# Altium PCB ertc_breakout_pcb.PcbDoc
Units mil, origin at the board's own origin, x right, y up, seen from the top; angles counter-clockwise.
Board outline 6300 x 8400 mil, 4 copper layers (Top Layer, Int1, Int2, Bottom Layer), stack 53.912 mil thick; 59 components, 84 nets, 412 pads, 22 vias.
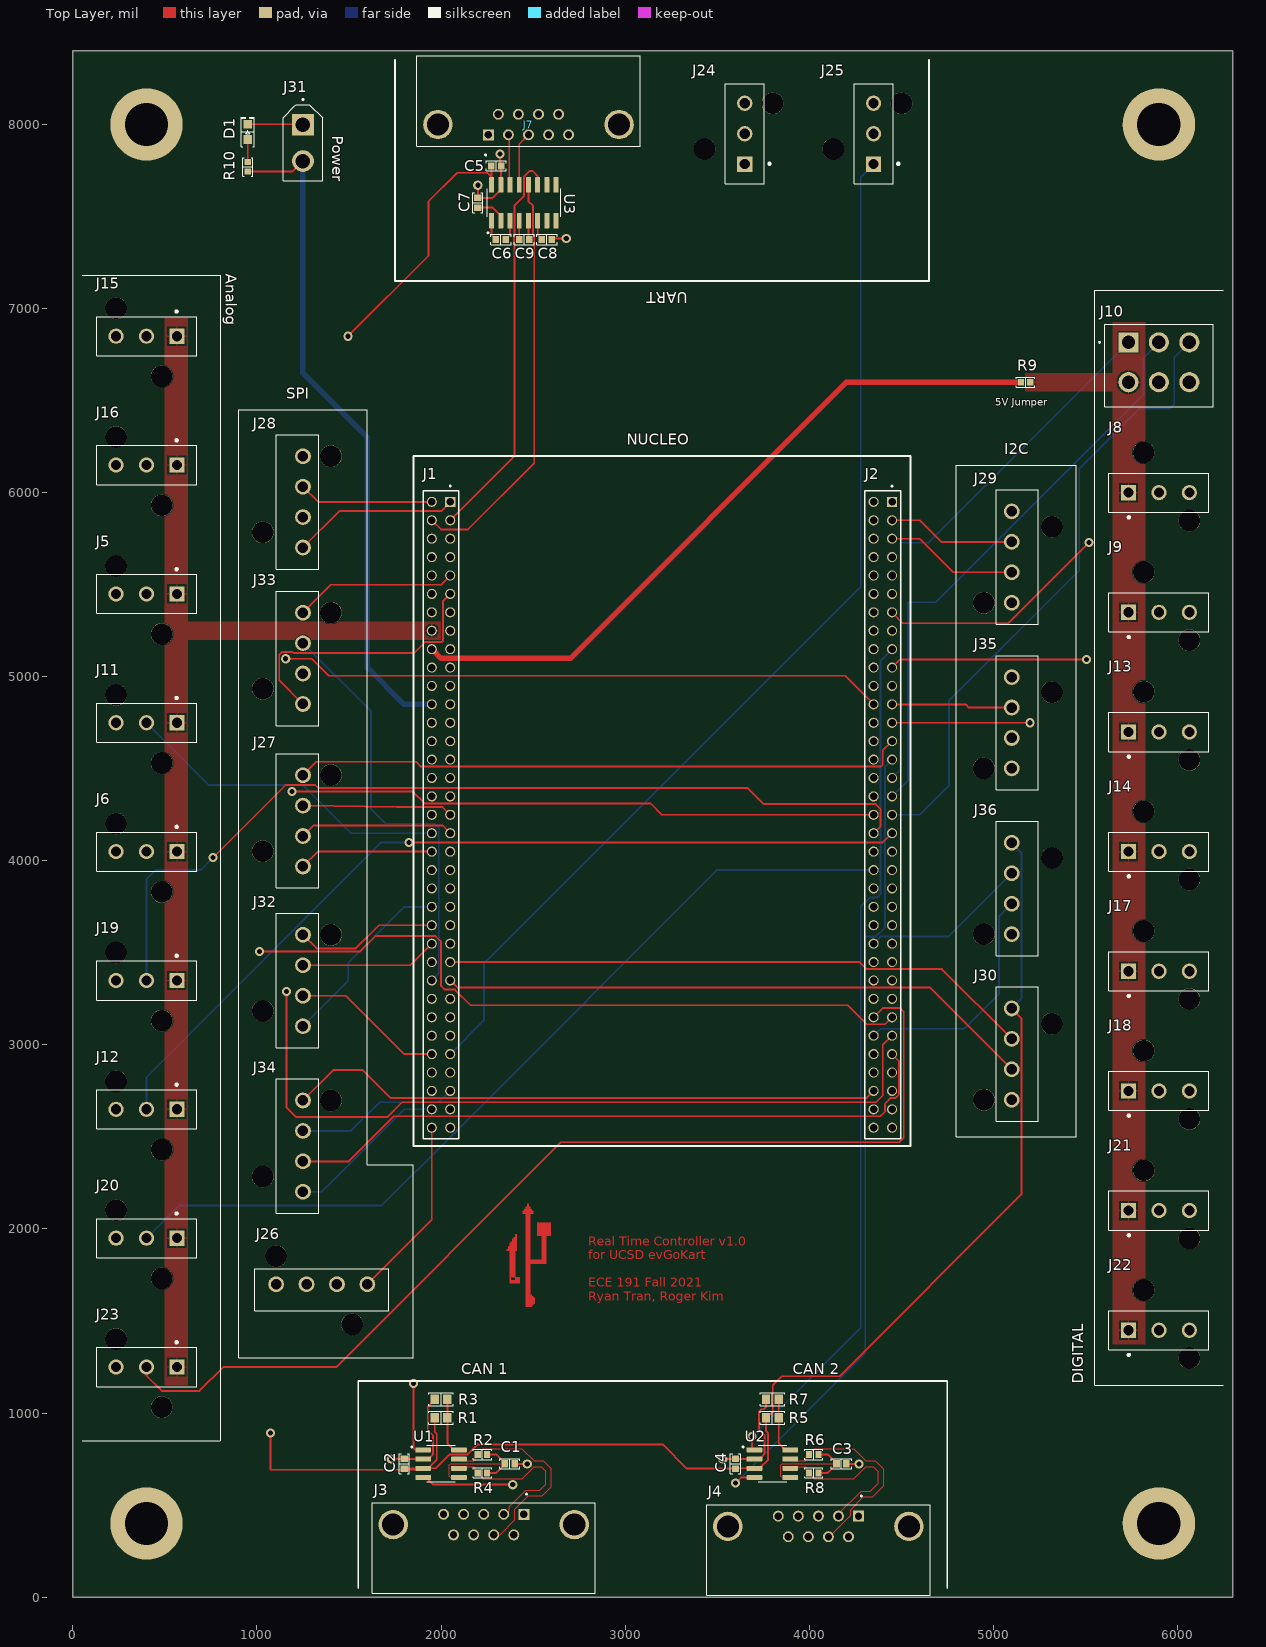
[diagram p0: Top Layer view]
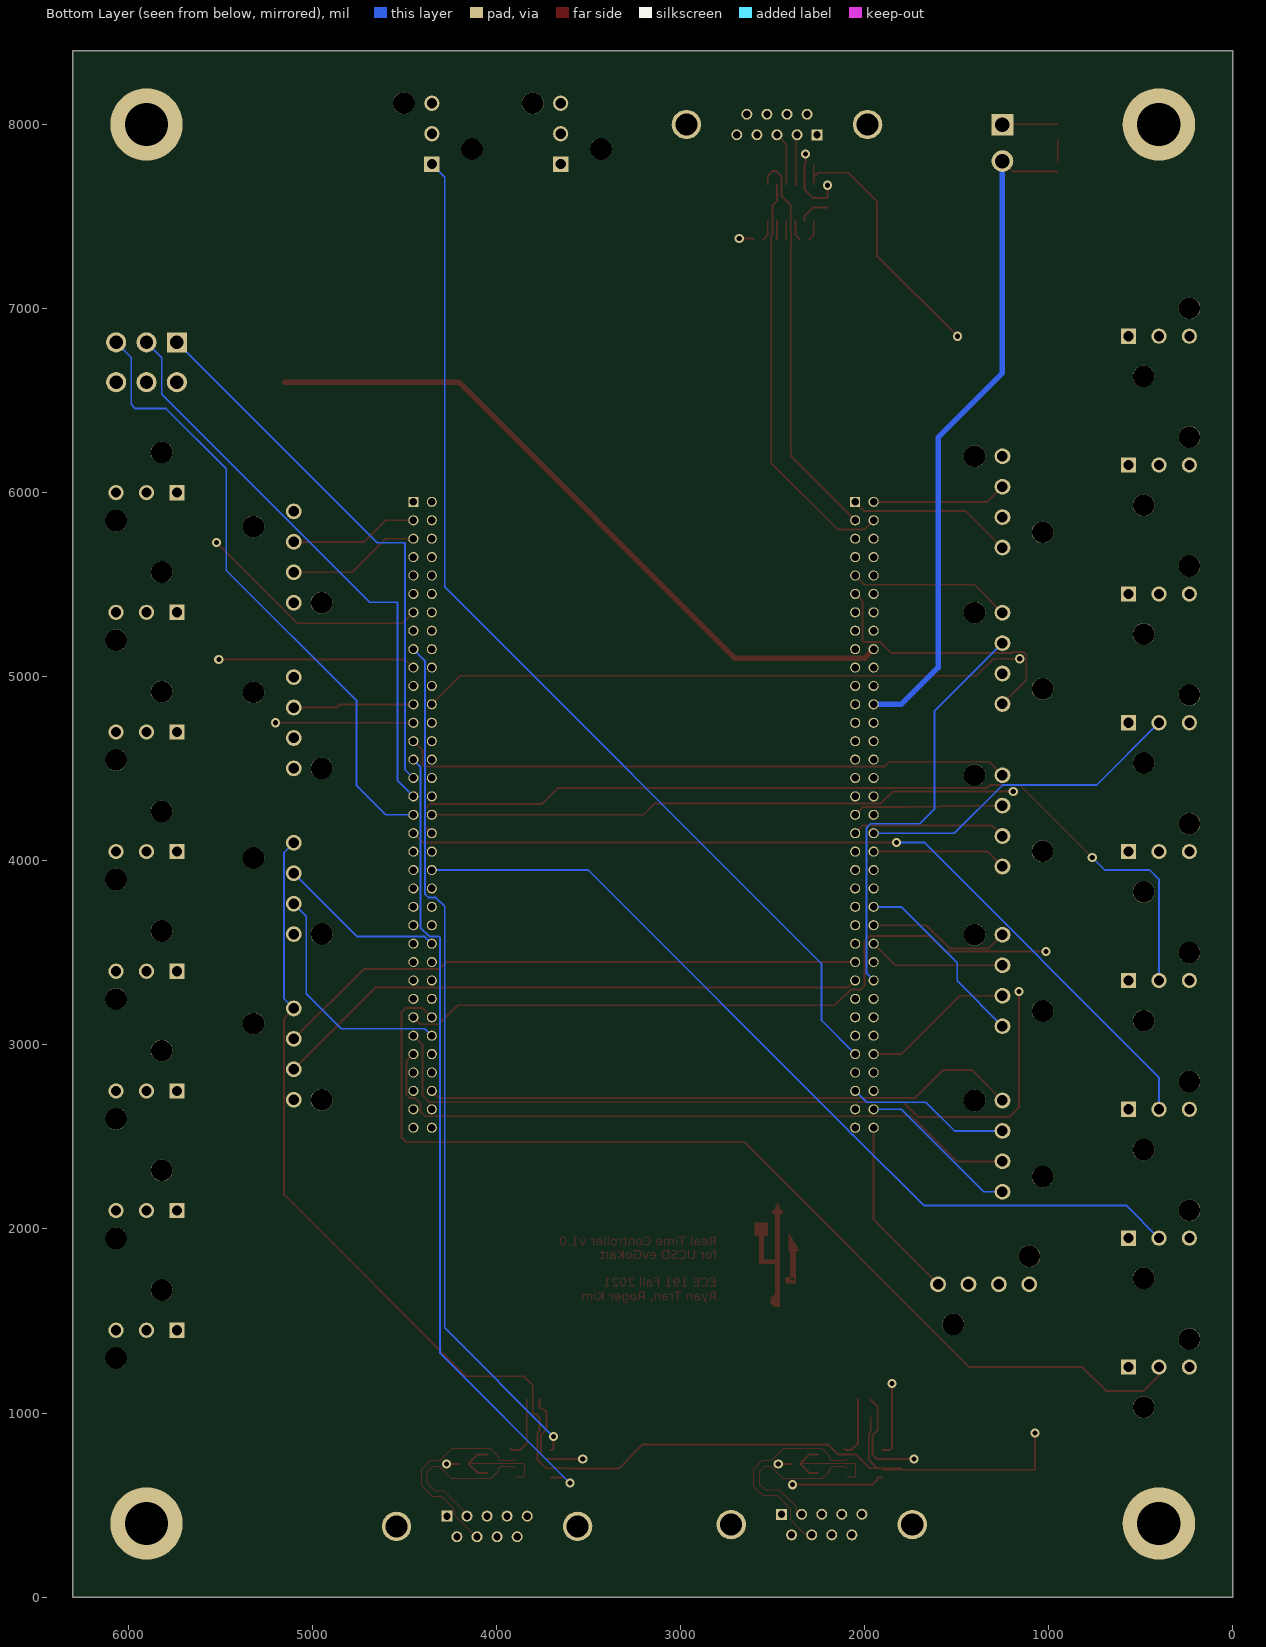
[diagram p1: Bottom Layer view, seen from below]
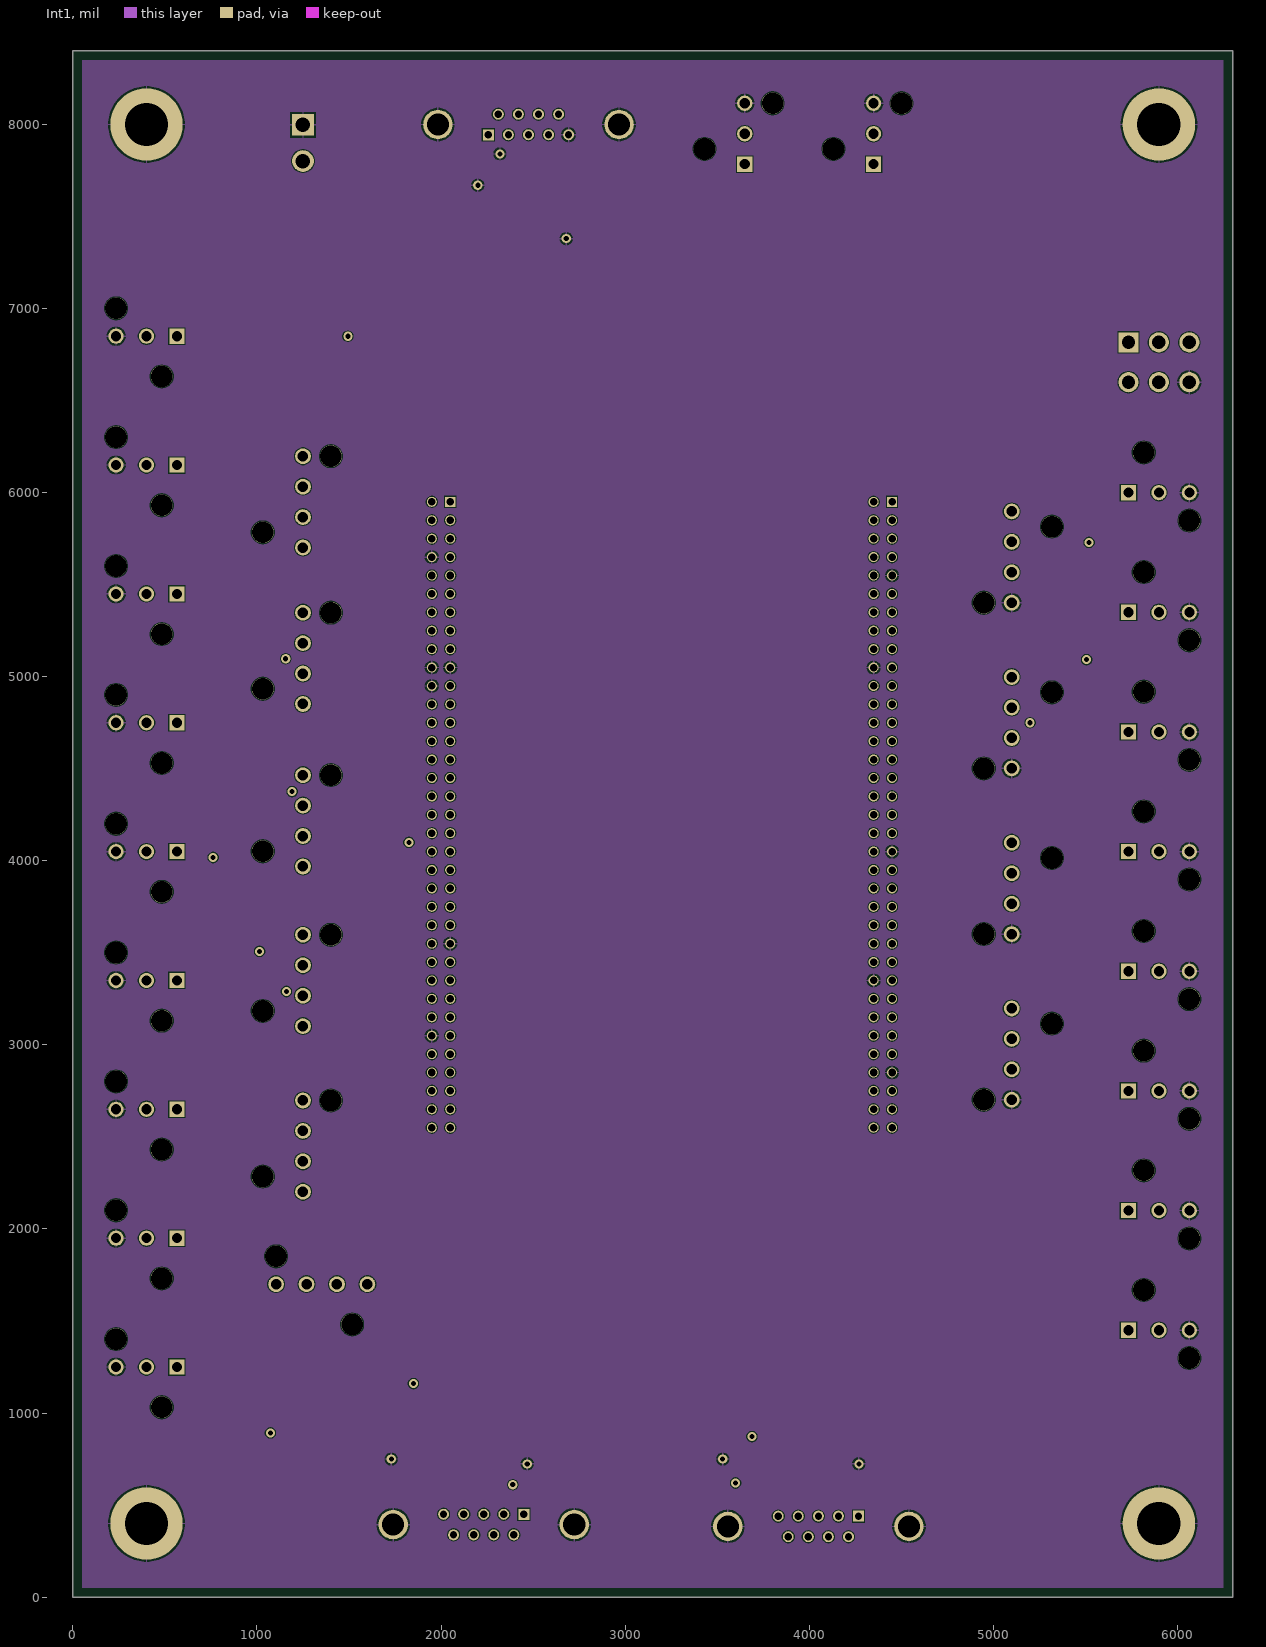
[diagram p2: Int1]
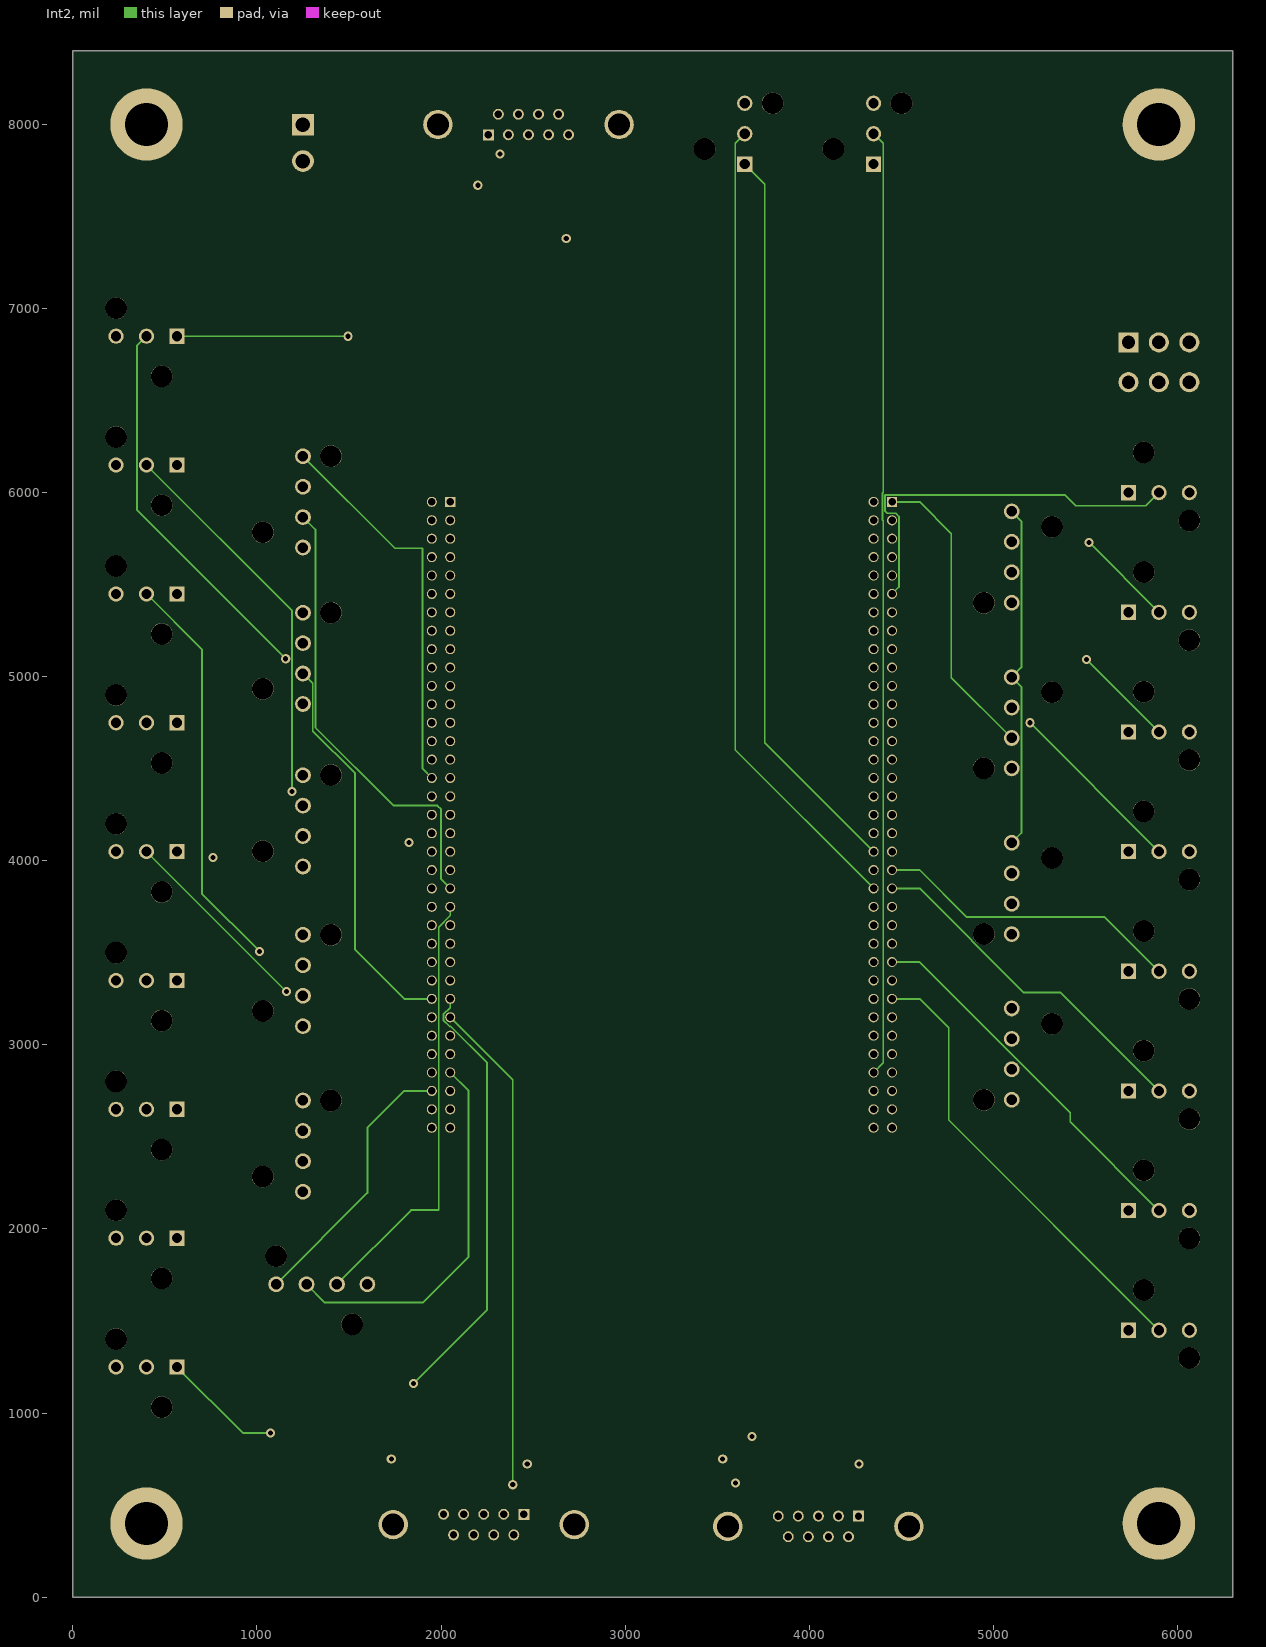
[diagram p3: Int2]
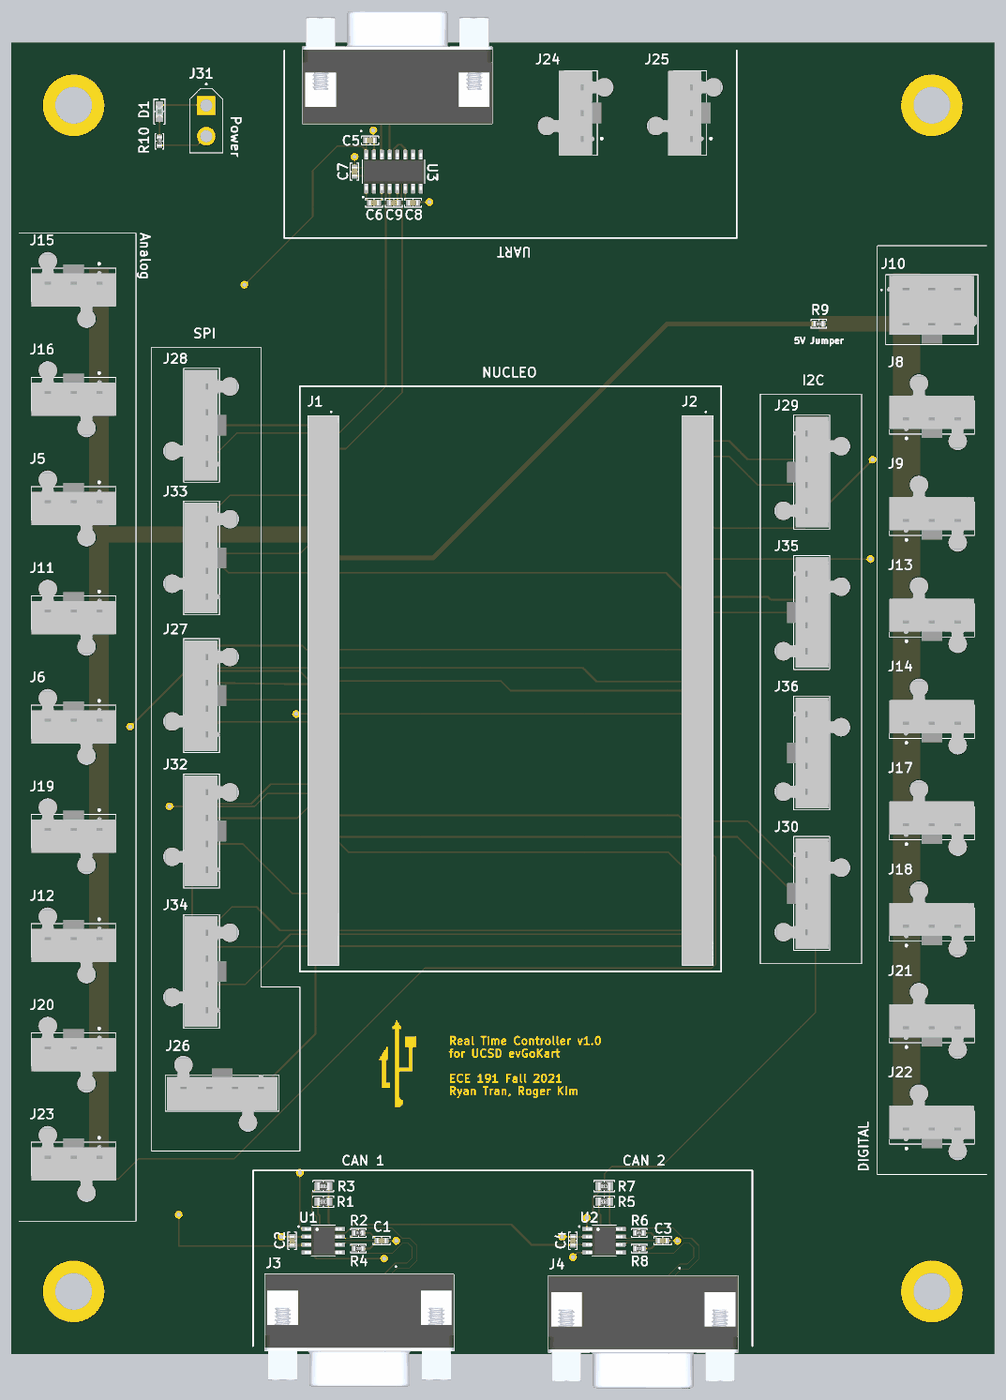
[diagram p4: 3D render of the assembled board from above, using the file's embedded part models]

## Layer stack, top to bottom
Top Solder: solder mask 1, SM-001, Dk 4
Top Layer: signal copper 1.378
Dielectric 1: prepreg 5.1, PP-017, Dk 4.3
Dielectric 2: prepreg 5.1, PP-017, Dk 4.3
Int1: signal copper 1.378
Dielectric 3: core 28, Core-039, Dk 4.8
Int2: signal copper 1.378
Dielectric 4: prepreg 5.1, PP-017, Dk 4.3
Dielectric 5: prepreg 5.1, PP-017, Dk 4.3
Bottom Layer: signal copper 1.378
Bottom Solder: solder mask 1, SM-001, Dk 4

## Board outline
0,0 0,8400 6300,8400 6300,0

## Design rules (kind name [scope] priority, off if disabled: settings)
Clearance [All] p1: gap=5 ignorepadtopadclearanceinfootprint=FALSE
DiffPairsRouting [All] p1: maxlimit=26 minlimit=26 mostfreqgap=26 toplayer_minwidth=5 toplayer_maxwidth=5 toplayer_prefwidth=5 midlayer1_minwidth=5 midlayer1_maxwidth=5 midlayer1_prefwidth=5 midlayer2_minwidth=5 midlayer2_maxwidth=5 midlayer2_prefwidth=5 bottomlayer_minwidth=5 bottomlayer_maxwidth=5 bottomlayer_prefwidth=5 maxuncoupledlength=500
PolygonConnect [All] p1: connectstyle=Relief reliefconductorwidth=10 reliefentries=4 polygonreliefangle="90 Angle" airgapwidth=10
RoutingVias [All] p1: holewidth=28 width=50 viastyle="Through Hole" minholewidth=28 minwidth=50 maxholewidth=100 maxwidth=100
SolderMaskExpansion [All] p1: expansion=4 istentingtop=FALSE
Width [All] p1: maxlimit=30 minlimit=5 preferedwidth=10
29 further rules are at their usual default settings.

## Classes and differential pairs
differential pair CAN2: +CAN2_P -CAN2_N
differential pair CAN1: +CAN1_P -CAN1_N

## Components (designator, comment, footprint, x,y, rotation, side; value= is the part's Value field where it differs from the comment)
C1 "4700pF" "CAP 0603_1608" 2373.43,725 r0 top
C2 "0.1µF" "CAP 0603_1608" 1800,725 r270 top
C3 "4700pF" "CAP 0603_1608" 4175,725 r0 top
C4 "0.1µF" "CAP 0603_1608" 3600,725 r270 top
C5 "0.1µF" "CAP 0603_1608" 2300,7775 r180 top
C6 "0.1µF" "CAP 0603_1608" 2325,7375 r180 top
C7 "0.1µF" "CAP 0603_1608" 2200,7575 r270 top
C8 "0.1µF" "CAP 0603_1608" 2575,7375 r180 top
C9 "0.1µF" "CAP 0603_1608" 2451.57,7375 r180 top
D1 "Green" "LED 0805_2012 GREEN" 950,7960 r90 top
J1 "SSW-135-01-T-D" SAMTEC_SSW-135-01-T-D 2050,5950 r90 top
J2 "SSW-135-01-T-D" SAMTEC_SSW-135-01-T-D 4450,5950 r90 top
J3 "A-DF_09_A/KG-T2S" ASSMANN_A-DF09A/KG-T2S 2231.89,394.09 r0 top
J4 "A-DF_09_A/KG-T2S" ASSMANN_A-DF09A/KG-T2S 4050,384.09 r0 top
J5 "39-30-1039" MOLEX_39-30-1039 400,5450 r0 top
J6 "39-30-1039" MOLEX_39-30-1039 400,4050 r0 top
J7 "A-DF_09_A/KG-T2S" ASSMANN_A-DF09A/KG-T2S 2475,8000 r180 top
J8 "39-30-1039" MOLEX_39-30-1039 5900,6000 r180 top
J9 "39-30-1039" MOLEX_39-30-1039 5900,5350 r180 top
J10 "0039281063" MOLEX_0039281063 5734.65,6816.54 r180 top
J11 "39-30-1039" MOLEX_39-30-1039 400,4750 r0 top
J12 "39-30-1039" MOLEX_39-30-1039 400,2650 r0 top
J13 "39-30-1039" MOLEX_39-30-1039 5900,4700 r180 top
J14 "39-30-1039" MOLEX_39-30-1039 5900,4050 r180 top
J15 "39-30-1039" MOLEX_39-30-1039 400,6850 r0 top
J16 "39-30-1039" MOLEX_39-30-1039 400,6150 r0 top
J17 "39-30-1039" MOLEX_39-30-1039 5900,3400 r180 top
J18 "39-30-1039" MOLEX_39-30-1039 5900,2750 r180 top
J19 "39-30-1039" MOLEX_39-30-1039 400,3350 r0 top
J20 "39-30-1039" MOLEX_39-30-1039 400,1950 r0 top
J21 "39-30-1039" MOLEX_39-30-1039 5900,2100 r180 top
J22 "39-30-1039" MOLEX_39-30-1039 5900,1450 r180 top
J23 "39-30-1039" MOLEX_39-30-1039 400,1250 r0 top
J24 "39-30-1039" MOLEX_39-30-1039 3650,7950 r270 top
J25 "39-30-1039" MOLEX_39-30-1039 4350,7950 r270 top
J26 "0039301049" MOLEX_0039301049 1351.97,1700 r0 top
J27 "0039301049" MOLEX_0039301049 1250,4217.32 r270 top
J28 "0039301049" MOLEX_0039301049 1250,5950 r270 top
J29 "0039301049" MOLEX_0039301049 5100,5650 r90 top
J30 "0039301049" MOLEX_0039301049 5100,2950 r90 top
J31 "XT30UPB-M" AMASS_XT30-M 1250,7900 r270 top
J32 "0039301049" MOLEX_0039301049 1250,3350 r270 top
J33 "0039301049" MOLEX_0039301049 1250,5100 r270 top
J34 "0039301049" MOLEX_0039301049 1250,2450 r270 top
J35 "0039301049" MOLEX_0039301049 5100,4750 r90 top
J36 "0039301049" MOLEX_0039301049 5100,3850 r90 top
R1 "1 kOhms" "RES 0805_2012" 2000,975 r180 top
R2 "60.4 Ohms" "RES 0603_1608" 2225,775 r0 top
R3 "1 kOhms" "RES 0805_2012" 2000,1075 r0 top
R4 "60.4 Ohms" "RES 0603_1608" 2225,675 r180 top
R5 "1 kOhms" "RES 0805_2012" 3800,975 r180 top
R6 "60.4 Ohms" "RES 0603_1608" 4025,775 r0 top
R7 "1 kOhms" "RES 0805_2012" 3800,1075 r0 top
R8 "60.4 Ohms" "RES 0603_1608" 4025,675 r180 top
R9 "=Value" "RES 0603_1608" 5175.59,6600 r0 top
R10 "1.2 kOhms" "RES 0603_1608" 950,7770 r90 top
U1 "SN65HVD230DR" SOIC127P599X175-8N 2000,725 r0 top
U2 "SN65HVD230DR" SOIC127P599X175-8N 3800,725 r0 top
U3 "MAX3232IDR" SOIC127P600X175-16N 2450,7575 r90 top

## Footprints (in the part's own frame and the unit in brackets; to place one, negate y for a bottom-side part, rotate by r counter-clockwise, add the part's x,y. Pads: shape width x height; smd on the part's side, far side on the other; paste and mask are expansions set on the pad)
AMASS_XT30-M [mm]
  rect 3x3 hole 2: 1(-2.5,0)
  round 3 hole 2: 2(2.5,0)
  silkscreen extent -6.1,-2.7 5.2,2.7
ASSMANN_A-DF09A/KG-T2S [mm]
  rect 1.508x1.508 hole 1: 1(5.54,1.42)
  round 1.508 hole 1: 2(2.77,1.42) 3(0,1.42) 4(-2.77,1.42) 5(-5.54,1.42) 6(4.155,-1.42) 7(1.385,-1.42) 8(-1.385,-1.42) 9(-4.155,-1.42)
  round 4.066 hole 3.05: S1(-12.495,0) S2(12.495,0)
  silkscreen extent -15.4,-9.5 15.41,4.3, body extent -15.41,-15.32 15.41,2.98, height 12.55
"CAP 0603_1608" [mm] "Chip Capacitor, 2-Leads, Body 1.60x0.80mm, IPC Medium Density"
  rect 0.9x1 smd: 1(-0.675,0) 2(0.675,0)
  silkscreen extent -1.4,-0.7 1.4,0.7, body extent -0.8,-0.41 0.8,0.41, height 0.82
"LED 0805_2012 GREEN" [mm] "Chip Diode, 2-Leads, Body 2.00x1.25mm, IPC Medium Density"
  rect 1.2x1.2 smd: 1(-1.05,0) 2(1.05,0)
  silkscreen extent -2.03,-0.9 2.03,0.9, body extent -1,-0.62 1,0.63, height 0.9
MOLEX_39-30-1039 [mm]
  rect 2.1x2.1 hole 1.4: 1(4.2,0)
  round 2.1 hole 1.4: 2(0,0) 3(-4.2,0)
  round 3 hole 3 unplated: ""(-4.2,3.85) ""(2.1,-5.55)
  silkscreen extent -6.9,-2.7 6.9,3.56, body extent -6.9,-6.63 6.9,4.93, height 12.45
MOLEX_0039281063 [mm]
  rect 2.775x2.775 hole 1.85: 1(0,0)
  round 2.775 hole 1.85: 2(-4.2,0) 3(-8.4,0) 4(0,5.5) 5(-4.2,5.5) 6(-8.4,5.5)
  silkscreen extent -11.7,-2.5 4.1,8.9, body extent -11.5,-2.3 3.1,8.7, height 12.8
MOLEX_0039301049 [mm]
  round 2.175 hole 1.45: 1(6.3,0) 2(2.1,0) 3(-2.1,0) 4(-6.3,0)
  round 3 hole 3 unplated: ""(-6.3,3.85) ""(4.2,-5.55)
  silkscreen extent -9.27,-3.68 9.27,2.16, body extent -9,-6.62 9,4.94, height 12.8
"RES 0603_1608" [mm] "Chip Resistor, 2-Leads, Body 1.60x0.80mm, IPC Medium Density"
  rect 0.85x0.95 smd: 1(-0.65,0) 2(0.65,0)
  silkscreen extent -1.27,-0.7 1.27,0.7, body extent -0.8,-0.4 0.8,0.4, height 0.45
"RES 0805_2012" [mm] "Chip Resistor, 2-Leads, Body 2.00x1.25mm, IPC Medium Density"
  rect 1.15x1.35 smd: 1(-0.875,0) 2(0.875,0)
  silkscreen extent -1.7,-0.9 1.7,0.9, body extent -1,-0.62 1,0.63, height 0.6
SAMTEC_SSW-135-01-T-D [mm]
  rect 1.39x1.39 hole 1.04: 01(0,0)
  round 1.39 hole 1.04: 02(0,2.54) 03(-2.54,0) 04(-2.54,2.54) 05(-5.08,0) 06(-5.08,2.54) 07(-7.62,0) 08(-7.62,2.54) 09(-10.16,0) 10(-10.16,2.54) 11(-12.7,0) 12(-12.7,2.54) 13(-15.24,0) 14(-15.24,2.54) 15(-17.78,0) 16(-17.78,2.54) 17(-20.32,0) 18(-20.32,2.54) 19(-22.86,0) 20(-22.86,2.54) 21(-25.4,0) 22(-25.4,2.54) 23(-27.94,0) 24(-27.94,2.54) 25(-30.48,0) 26(-30.48,2.54) 27(-33.02,0) 28(-33.02,2.54) 29(-35.56,0) 30(-35.56,2.54) 31(-38.1,0) 32(-38.1,2.54) 33(-40.64,0) 34(-40.64,2.54) 35(-43.18,0) 36(-43.18,2.54) 37(-45.72,0) 38(-45.72,2.54) 39(-48.26,0) 40(-48.26,2.54) 41(-50.8,0) 42(-50.8,2.54) 43(-53.34,0) 44(-53.34,2.54) 45(-55.88,0) 46(-55.88,2.54) 47(-58.42,0) 48(-58.42,2.54) 49(-60.96,0) 50(-60.96,2.54) 51(-63.5,0) 52(-63.5,2.54) 53(-66.04,0) 54(-66.04,2.54) 55(-68.58,0) 56(-68.58,2.54) 57(-71.12,0) 58(-71.12,2.54) 59(-73.66,0) 60(-73.66,2.54) 61(-76.2,0) 62(-76.2,2.54) 63(-78.74,0) 64(-78.74,2.54) 65(-81.28,0) 66(-81.28,2.54) 67(-83.82,0) 68(-83.82,2.54) 69(-86.36,0) 70(-86.36,2.54)
  silkscreen extent -87.89,-1.21 2.27,3.75, body extent -87.88,-1.21 1.52,3.75, height 8.51
SOIC127P599X175-8N [mil]
  rrect25% 85x27 smd: 1(-97.24,75) 2(-97.24,25) 3(-97.24,-25) 4(-97.24,-75) 5(97.24,-75) 6(97.24,-25) 7(97.24,25) 8(97.24,75)
  silkscreen extent -163,-99 77,99, body extent -118,-96 118,96, height 69
SOIC127P600X175-16N [mil]
  rrect25% 85x27 smd: 1(-97.44,175) 2(-97.44,125) 3(-97.44,75) 4(-97.44,25) 5(-97.44,-25) 6(-97.44,-75) 7(-97.44,-125) 8(-97.44,-175) 9(97.44,-175) 10(97.44,-125) 11(97.44,-75) 12(97.44,-25) 13(97.44,25) 14(97.44,75) 15(97.44,125) 16(97.44,175)
  silkscreen extent -167,-199 77,199, body extent -118,-195 118,195, height 69

## Part data
C1 C3: library part CGA3E2X7R1H472K080AA, "CAP CER 4700PF 50V X7R 0603", Device Package="0603 (1608 Metric)", Manufacturer="TDK Corporation", Operating Temperature="-55°C ~ 125°C", Ratings=AEC-Q200, Supplier Part Number 1=445-5661-1-ND, Temperature Coefficient=X7R, Tolerance=±10%, Voltage - Rated=50V, Applications=Automotive, Capacitance=4700pF, ComponentLink1Description=Datasheet, ComponentLink1URL=https://product.tdk.com/info/en/catalog/datasheets/mlcc_automotive_general_en.pdf?ref_disty=digikey, ComponentLink2Description="DigiKey Link", ComponentLink2URL=http://digikey.com/product-detail/en/tdk-corporation/CGA3E2X7R1H472K080AA/445-5661-1-ND/2443701, LastUpdated="9/2/2020 1:03:30 AM", Lifecycle Status=Active, Minimum Order=1, Mounting Type="Surface Mount, MLCC", Package / Case="0603 (1608 Metric)", Packaging=TapeAndReel, Part Number=CGA3E2X7R1H472K080AA, Part Status=Active, PartId=5842, Price=0.01, Series=CGA, Size / Dimension="0.063\" L x 0.031\" W (1.60mm x 0.80mm)", Supplier 1=DigiKey, Thickness (Max)="0.035\" (0.90mm)"
C2 C4 C5 C6 C7 C8 C9: library part CL10B104KA8NNNC, "CAP CER 0.1UF 25V X7R 0603", Device Package="0603 (1608 Metric)", Manufacturer="Samsung Electro-Mechanics", Operating Temperature="-55°C ~ 125°C", Supplier Part Number 1=1276-1006-1-ND, Temperature Coefficient=X7R, Tolerance=±10%, Voltage - Rated=25V, Applications="General Purpose", Capacitance=0.1µF, ComponentLink1Description=Datasheet, ComponentLink1URL=http://www.samsungsem.com/kr/support/product-search/mlcc/CL10B104KA8NNNC.jsp, ComponentLink2Description="DigiKey Link", ComponentLink2URL=http://digikey.com/product-detail/en/samsung-electro-mechanics/CL10B104KA8NNNC/1276-1006-1-ND/3889092, LastUpdated="9/2/2020 1:03:22 AM", Lifecycle Status=Active, Minimum Order=1, Mounting Type="Surface Mount, MLCC", Package / Case="0603 (1608 Metric)", Packaging=TapeAndReel, Part Number=CL10B104KA8NNNC, Part Status=Active, PartId=9793, Price=0.01, Series=CL, Size / Dimension="0.063\" L x 0.031\" W (1.60mm x 0.80mm)", Supplier 1=DigiKey, Thickness (Max)="0.035\" (0.90mm)"
D1: library part LTST-C170GKT, "LED GREEN CLEAR SMD", Current - Test=10mA, Device Package="0805 (2012 Metric)", Lens Color=Colorless, Manufacturer="Lite-On Inc.", Millicandela Rating=6mcd, Supplier Part Number 1=160-1179-1-ND, Voltage - Forward (Vf) (Typ)=2.1V, Color=Green, ComponentLink1Description=Datasheet, ComponentLink1URL=//media.digikey.com/pdf/Data%20Sheets/Lite-On%20PDFs/LTST-C170GKT.pdf, ComponentLink2Description="DigiKey Link", ComponentLink2URL=http://digikey.com/product-detail/en/lite-on-inc/LTST-C170GKT/160-1179-1-ND/269251, Configuration=Standard, Height (Max)=1.10mm, LastUpdated="9/2/2020 1:21:04 AM", Lens Size="1.40mm x 1.25mm", Lens Style="Rectangle with Flat Top", Lens Transparency=Clear, Lifecycle Status=Active, Minimum Order=1, Mounting Type="Surface Mount", Package / Case="0805 (2012 Metric)", Packaging=TapeAndReel, Part Number=LTST-C170GKT, Part Status=Active, PartId=282, Price=0.05, Series=-, Size / Dimension="2.00mm L x 1.25mm W", Supplier 1=DigiKey, Viewing Angle=130°, Wavelength - Dominant=569nm, Wavelength - Peak=565nm
J1 J2: Package=None, Availability=Unavailable, MF=Samtec, MP=SSW-135-01-T-D, Price=None
J3 J4 J7: "9 Position D-Sub Receptacle, Female Sockets Connector", Package=None, Availability=Unavailable, Check_prices=https://www.snapeda.com/parts/A-DF%2009%20A/KG-T2S/Assmann%20WSW%20Components/view-part/2761262/?ref=eda, MF="Assmann WSW", MP="A-DF 09 A/KG-T2S", Price=None, SnapEDA_Link=https://www.snapeda.com/parts/A-DF%2009%20A/KG-T2S/Assmann%20WSW%20Components/view-part/2761262/?ref=snap
J5 J6 J8 J9 J11 J12 J13 J14 J15 J16 J17 J18 J19 J20 J21 J22 J23 J24 J25: "Connector Header Through Hole 3 position 0.165 _4.20mm_", Package=None, Availability=Unavailable, MF=Molex, MP=39301039, Price=None, SnapEDA_Link=https://www.snapeda.com/parts/39301039/Molex/view-part/1160208/?ref=snap
J10: "Connector Header Through Hole, 6 position 0.165 (4.20mm)", Package=None, Availability=Unavailable, DigiKey-Purchase-URL=https://snapeda.com/shop?store=DigiKey&id=2597941, MF=Molex, MP=0026013115, Price=None, SnapEDA_Link=https://www.snapeda.com/parts/0026013115/Molex/view-part/2597941/?ref=snap
J26 J27 J28 J29 J30 J32 J33 J34 J35 J36: "Connector Header Through Hole 4 position 0.165 _4.20mm_", Package=None, Availability=Unavailable, MF=Molex, MP=0039301049, Price=None, SnapEDA_Link=https://www.snapeda.com/parts/0039301049/Molex/view-part/104320/?ref=snap
J31: "Plug; DC supply; XT60; male; PIN: 2; for cable; soldered; 30A; 500V", Package="Package Analog Devices", Availability=Unavailable, MF=AMASS, MP=XT60-M, Price=None, SnapEDA_Link=https://www.snapeda.com/parts/XT60-M/AMASS/view-part/2883912/?ref=snap
R1 R3 R5 R7: library part RNCP0805FTD1K00, "RES 1K OHM 1% 1/4W 0805", Device Package="0805 (2012 Metric)", Manufacturer="Stackpole Electronics Inc", Operating Temperature="-55°C ~ 155°C", Power (Watts)="0.25W, 1/4W", Supplier Device Package=0805, Supplier Part Number 1=RNCP0805FTD1K00CT-ND, Temperature Coefficient=±100ppm/°C, Tolerance=±1%, ComponentLink1Description=Datasheet, ComponentLink1URL=https://www.seielect.com/catalog/sei-rncp.pdf, ComponentLink2Description="DigiKey Link", ComponentLink2URL=http://digikey.com/product-detail/en/stackpole-electronics-inc/RNCP0805FTD1K00/RNCP0805FTD1K00CT-ND/2240568, Composition="Thin Film", Features="Anti-Sulfur, Moisture Resistant", Height - Seated (Max)="0.024\" (0.60mm)", LastUpdated="9/2/2020 1:15:23 AM", Lifecycle Status=Active, Minimum Order=1, Number of Terminations=2, Package / Case="0805 (2012 Metric)", Packaging=TapeAndReel, Part Number=RNCP0805FTD1K00, Part Status=Active, PartId=28023, Price=0.01, Resistance="1 kOhms", Series=RNCP, Size / Dimension="0.079\" L x 0.049\" W (2.00mm x 1.25mm)", Supplier 1=DigiKey
R2 R4 R6 R8: library part RMCF0603FT60R4, "RES 60.4 OHM 1% 1/10W 0603", Device Package="0603 (1608 Metric)", Manufacturer="Stackpole Electronics Inc", Operating Temperature="-55°C ~ 155°C", Power (Watts)="0.1W, 1/10W", Ratings=AEC-Q200, Supplier Device Package=0603, Supplier Part Number 1=RMCF0603FT60R4CT-ND, Temperature Coefficient=±100ppm/°C, Tolerance=±1%, ComponentLink1Description=Datasheet, ComponentLink1URL=https://www.seielect.com/catalog/sei-rmcf_rmcp.pdf, ComponentLink2Description="DigiKey Link", ComponentLink2URL=http://digikey.com/product-detail/en/stackpole-electronics-inc/RMCF0603FT60R4/RMCF0603FT60R4CT-ND/2418105, Composition="Thick Film", Features="Automotive AEC-Q200", Height - Seated (Max)="0.022\" (0.55mm)", LastUpdated="9/2/2020 1:10:13 AM", Lifecycle Status=Active, Minimum Order=1, Number of Terminations=2, Package / Case="0603 (1608 Metric)", Packaging=CutTape, Part Number=RMCF0603FT60R4, Part Status=Active, PartId=10803, Price=0.10, Resistance="60.4 Ohms", Series=RMCF, Size / Dimension="0.061\" L x 0.031\" W (1.55mm x 0.80mm)", Supplier 1=DigiKey
R9: library part CRCW06030000Z0EBC, "RES SMD 0 OHM JUMP 1/10W 0603", Device Package="0603 (1608 Metric)", Manufacturer="Vishay Dale", Operating Temperature="-55°C ~ 155°C", Power (Watts)="0.1W, 1/10W", Supplier Device Package=0603, Supplier Part Number 1=541-4013-1-ND, Tolerance=Jumper, ComponentLink1Description=Datasheet, ComponentLink1URL=http://www.vishay.com/docs/28773/crcwce3.pdf, ComponentLink2Description="DigiKey Link", ComponentLink2URL=http://digikey.com/product-detail/en/vishay-dale/CRCW06030000Z0EBC/541-4013-1-ND/7928696, Composition="Thick Film", Height - Seated (Max)="0.022\" (0.55mm)", LastUpdated="9/2/2020 1:10:22 AM", Lifecycle Status=Active, Minimum Order=1, Number of Terminations=2, Package / Case="0603 (1608 Metric)", Packaging=CutTape, Part Number=CRCW06030000Z0EBC, Part Status=Active, PartId=6257, Price=0.10, Series=CRCW-C, Supplier 1=DigiKey
R10: library part CRGCQ0603F1K2, "CRGCQ 0603 1K2 1%", Device Package="0603 (1608 Metric)", Manufacturer="TE Connectivity Passive Product", Operating Temperature="-55°C ~ 155°C", Power (Watts)="0.1W, 1/10W", Ratings=AEC-Q200, Supplier Device Package=0603, Supplier Part Number 1=A129689CT-ND, Temperature Coefficient=±100ppm/°C, Tolerance=±1%, ComponentLink1Description=Datasheet, ComponentLink1URL=https://www.te.com/commerce/DocumentDelivery/DDEController?Action=srchrtrv&DocNm=1773204-3&DocType=DS&DocLang=English, ComponentLink2Description="DigiKey Link", ComponentLink2URL=http://digikey.com/product-detail/en/te-connectivity-passive-product/CRGCQ0603F1K2/A129689CT-ND/8577521, Composition="Thick Film", Features="Automotive AEC-Q200, Moisture Resistant", Height - Seated (Max)="0.022\" (0.55mm)", LastUpdated="9/2/2020 1:09:39 AM", Lifecycle Status=Active, Minimum Order=1, Number of Terminations=2, Package / Case="0603 (1608 Metric)", Packaging=CutTape, Part Number=CRGCQ0603F1K2, Part Status=Active, PartId=23998, Price=0.10, Resistance="1.2 kOhms", Series=CRGCQ, Size / Dimension="0.063\" L x 0.031\" W (1.60mm x 0.80mm)", Supplier 1=DigiKey
U1 U2: "3.3 V CAN Transceiver with Standby Mode 8-SOIC -40 to 85", Package="SOIC-8 Texas Instruments", Arrow_Electronics-Purchase-URL=https://snapeda.com/shop?store=Arrow+Electronics&id=51767, Availability=Good, DigiKey-Purchase-URL=https://snapeda.com/shop?store=DigiKey&id=51767, MF="Texas Instruments", Mouser-Purchase-URL=https://snapeda.com/shop?store=Mouser&id=51767, MP=SN65HVD230DR, Price=None, SnapEDA_Link=https://www.snapeda.com/parts/SN65HVD230DR/Texas%20Instruments/view-part/51767/?ref=snap, Texas_Instruments-Purchase-URL=https://snapeda.com/shop?store=Texas+Instruments&id=51767
U3: "3-V to 5.5-V multichannel RS-232 line driver & receiver 16-SOIC -40 to 85", Package="SOIC-16 Texas Instruments", Check_prices=https://www.snapeda.com/parts/MAX3232IDR/Texas%20Instruments/view-part/559735/?ref=eda, Digi-Key_Part_Number=296-13098-1-ND, MF="Texas Instruments", MP=MAX3232IDR, Purchase-URL=https://pricing.snapeda.com/search/part/MAX3232IDR/?ref=eda, SnapEDA_Link=https://www.snapeda.com/parts/MAX3232IDR/Texas%20Instruments/view-part/559735/?ref=snap

## Free pads (board coordinates)
  round 393.7 hole 236.22: ""(400,400) ""(400,8000) ""(5900,400) ""(5900,8000)

## Via types
v1: diameter 50, hole 28, Top Layer to Bottom Layer, 22 vias

## Nets (pads, with @x,y where several pads share a name; then routed paths per layer and width w, separated by ;. In a path a pad name is that pad's centre, name@x,y a point inside that pad or via, vN(x,y) a via of type N, cw(c..) or ccw(c..) an arc to the next point about the centre after c; other vN are vias at no path point)
3V3: C2.2 C4.2 C5.2 J1.16 J5.1 J6.1 J11.1 J12.1 J15.1 J16.1 J19.1 J20.1 J23.1 J29.1 J30.1 J35.1 J36.1 R1.2 R5.2 U1.3 U2.3 U3.16 | length 12570.2
  Top Layer w10: v1(1073.35,892) 1073.35,692 U1.3@1902.76,692 ; v1(1494,6850) 1932,7288 1932,7582 2088,7738 2250,7738 2275,7713 U3.16 2275,7773.43 C5.2 ; C2.2 1801.57,700 U1.3 U1.3@1929.72,700 ; R1.2 1965.55,897.26 1976.54,886.27 1976.54,746.81 U1.3@1929.72,700 ; J30.1 5153,3145.03 5153,2188 4165,1200 3850,1200 3801.81,1151.81 3801.81,1000.88 3795.95,995.03 3783.19,995.03 3765.55,977.39 3765.55,900.7 3776.54,889.72 3776.54,746.81 3729.72,700 U2.3 3601.57,700 C4.2 3335.57,698.43 3204,830 2200,830 2145,775 2047,775 1972,700 U1.3@1929.72,700
  Int2 w10: J23.1 923.35,892 v1(1073.35,892) ; J15.1 v1(1494,6850) ; J36.1 5153,4151.03 5153,4945.03 J35.1 5153,5051.03 5153,5845.03 J29.1
  Bottom Layer w10: J30.1 5153,3251.03 5153,4045.03 J36.1
5V: J1.18 R9.1 | length 3848.6
  Top Layer w30: J1.18@1954.66,5154.66 J1.18 2000,5100 2702.48,5100 4202.48,6600 R9.1
A0: J2.57 J5.2 | length 6022
  Top Layer w10: v1(1014,3508) 1561,3508 1644,3591 1970,3591 2000,3561 2000,3320 2020,3300 2075,3300 2160,3215 4210,3215 4313,3112 4412,3112 J2.57
  Int2 w10: J5.2 701,5149 701,3821 v1(1014,3508)
A1: J2.59 J6.2 | length 5359.9
  Top Layer w10: v1(1160,3290) 1160,2661 1213,2608 1708,2608 1788,2688 4363,2688 4400,2725 4400,3000 J2.59
  Int2 w10: J6.2 v1(1160,3290)
A2: J1.38 J11.2 | length 1798.5
  Bottom Layer w10: J11.2 738,4412 1249,4412 1511,4150 J1.38
A3: J2.37 J12.2 | length 4773.2
  Top Layer w10: v1(1826,4100) 4400,4100 J2.37
  Bottom Layer w10: J12.2 400,2824 1676,4100 v1(1826,4100)
A4: J2.24 J15.2 | length 5404.9
  Top Layer w10: v1(1156,5098) 1298,5098 1391,5005 4195,5005 J2.24
  Int2 w10: J15.2 348,6798 348,5906 v1(1156,5098)
A5: J2.36 J16.2 | length 5312.8
  Top Layer w10: v1(1191,4376) 1847,4376 1911,4312 3138,4312 3200,4250 J2.36
  Int2 w10: J16.2 1191,5359 v1(1191,4376)
A6: J2.38 J19.2 | length 4950.5
  Top Layer w10: v1(762,4018) 1156,4412 1317,4412 1333,4396 3664,4396 3751,4309 4359,4309 4388,4280 4388,4188 J2.38
  Bottom Layer w10: J19.2 400,3900 450,3950 694,3950 v1(762,4018)
A7: J2.42 J20.2 | length 4779.2
  Bottom Layer w10: J20.2 578,2128 1678,2128 2062.64,2512.64 2065.48,2512.64 2087.36,2534.52 2087.36,2537.36 3501.5,3951.5 ; 3503,3950 J2.42
A8: J2.58 J23.2 | length 5642.9
  Top Layer w10: J23.2 400,1203 483,1120 687,1120 817,1250 1430,1250 2651,2471 4490,2471 4514,2495 4514,3180 4494,3200 4400,3200 J2.58
CAN1_N: J3.2 R4.2 U1.6 | length 931
  Top Layer w5: U1.6 2106.28,709.03 2135.98,709.03 2136.45,709.5 2178.34,709.5 2185.18,702.67 2185.18,689.23 R4.2 2199.41,673.03 2228.64,643.8 2440.83,643.8 2505.88,708.85 2543.72,708.85 2569,683.57 2569,612.84 2537.16,581 2460.11,581 2369.42,490.31 2369.42,469.97 2355.47,456.01 2355.47,450 J3.2
CAN1_P: J3.7 R2.1 U1.7 | length 1149.6
  Top Layer w5: U1.7 2106.28,740.97 2135.98,740.97 2136.45,740.5 2178.84,740.5 2185.18,746.83 2185.18,760.77 R2.1 2199.41,776.97 2228.64,806.2 2438.83,806.2 2505.18,739.85 2556.56,739.85 2600,696.41 2600,600 2550,550 2472.95,550 2400.42,477.47 2400.42,419.63 2320.67,339.88 2310.82,339.88 2300.94,330 2300.94,333 2291.61,333 J3.7
CAN1_RX: J1.57 U1.4 | length 3190.3
  Top Layer w10: U1.4 1930,650 1930,638 1957,611 v1(2390,611)
  Int2 w10: J1.57 2390,2810 v1(2390,611)
CAN1_TX: J1.55 U1.1 | length 2779.7
  Top Layer w10: v1(1850,1160) 1850,810 1860,800 U1.1
  Int2 w10: v1(1850,1160) 2250,1560 2250,2902.84 2052.84,3100 2047.16,3100 2012.64,3134.52 2012.64,3165.48 2050,3202.84 J1.55
CAN2_N: J4.2 R8.2 U2.6 | length 915.6
  Top Layer w5: U2.6 3906.28,709.03 3935.98,709.03 3936.45,709.5 3978.34,709.5 3985.18,702.67 3985.18,689.23 R8.2 3999.41,673.03 4028.64,643.8 4242.83,643.8 4307.88,708.85 4347.31,708.85 4375,681.16 4375,618.84 4331.16,575 4282.22,575 4159.06,451.83 J4.2
CAN2_P: J4.7 R6.1 U2.7 | length 1117.9
  Top Layer w5: U2.7 3906.28,740.97 3935.98,740.97 3936.45,740.5 3978.84,740.5 3985.18,746.83 3985.18,760.77 R6.1 3999.41,776.97 4028.64,806.2 4240.83,806.2 4307.18,739.85 4360.15,739.85 4406,694 4406,606 4344,544 4295.06,544 4225,473.94 4225,443.82 4109.37,328.19 J4.7
CAN2_RX: J2.29 U2.4 | length 4427.7
  Top Layer w10: v1(3600,620) 3630,650 U2.4
  Bottom Layer w10: v1(3600,620) 4305,1325 4305,3582 4312,3589 4364,3589 4412,3637 4412,4512 J2.29
CAN2_TX: J2.17 U2.1 | length 4698.1
  Top Layer w10: v1(3689.21,871.92) 3689.21,806.81 3696.03,800 U2.1
  Bottom Layer w10: v1(3689.21,871.92) 4280,1462.71 4280,3752 4328,3800 4368,3800 4388,3820 4388,5088 J2.17
GND: C1.2 C2.1 C3.2 C4.1 C5.1 C7.1 C8.1 D1.2 J1.08 J1.19 J1.20 J1.22 J1.49 J1.60 J2.09 J2.20 J2.39 J2.54 J2.63 J3.S1 J3.S2 J4.S1 J4.S2 J5.3 J6.3 J7.5 J7.S1 J7.S2 J8.3 J9.3 J10.6 J11.3 J12.3 J13.3 J14.3 J15.3 J16.3 J17.3 J18.3 J19.3 J20.3 J21.3 J22.3 J23.3 J24.3 J25.3 J29.4 J30.4 J31.1 J35.4 J36.4 pad. R3.1 R7.1 U1.2 U2.2 U3.15 | length 2213.4
  Top Layer w10: D1.2 1247.09,8001.34 J31.1 J31.1@1242.91,7991.34 ; C2.1 1731.57,751.57 v1(1730,750) U1.2 1929.72,750 1956.54,776.81 1956.54,877.99 1927.91,906.61 1927.91,1033.43 1965.55,1071.06 R3.1 ; v1(2200,7670) C7.1 2281.1,7601.57 2325,7645.47 U3.15 2325,7773.43 C5.1 2320,7781.57 v1(2320,7840) ; C1.2 2401,724 v1(2468,724) ; C8.1 2606.57,7380 v1(2680,7380) ; C4.1 3531.57,751.57 v1(3530,750) U2.2 3729.72,750 3756.54,776.81 3756.54,881.44 3727.91,910.06 3727.91,1007.79 3740.73,1020.61 3752.73,1020.61 3765.55,1033.43 R7.1 ; C3.2 4202.57,724 v1(4270,724)
I2C1_SCL: J2.03 J29.2 | length 698.6
  Top Layer w10: J2.03 4600,5850 4717.32,5732.68 J29.2
I2C1_SDA: J2.05 J29.3 | length 725.7
  Top Layer w10: J2.05 4600,5750 4782.68,5567.32 J29.3
I2C2_SCL: J1.51 J30.2 | length 3222.9
  Top Layer w10: J1.51 4275,3450 4313,3412 4720.68,3412 J30.2
I2C2_SDA: J1.53 J30.3 | length 3249.9
  Top Layer w10: J1.53 2088,3312 4655.32,3312 J30.3
I2C3_SCL: J2.23 J35.2 | length 657.2
  Top Layer w10: J2.23 4850,4850 4867.32,4832.68 J35.2
I2C3_SDA: J2.01 J35.3 | length 1639.8
  Int2 w10: J2.01 4600,5950 4772,5778 4772,4995.32 J35.3
I2C4_SCL: J2.50 J36.2 | length 908.5
  Bottom Layer w10: J2.50 4388,3588 4755.32,3588 J36.2
I2C4_SDA: J2.60 J36.3 | length 1294.5
  Bottom Layer w10: J2.60 4388,3088 4843,3088 5032,3277 5032,3699.32 J36.3
NetC1_1: C1.1 R2.2 R4.1 U1.5 | length 656.1
  Top Layer w5: U1.5 2052.93,650 2045.96,656.96 2045.96,718.04 2052.93,725 2344.88,725 C1.1@2346.85,726.97
  Top Layer w10: R4.1 2298.82,675 2346.85,723.03 C1.1 2346.85,726.97 2298.82,775 R2.2
NetC3_1: C3.1 R6.2 R8.1 U2.5 | length 660
  Top Layer w5: U2.5 3852.93,650 3845.96,656.96 3845.96,718.04 3852.93,725 C3.1
  Top Layer w10: R8.1 4100.39,675 4148.43,723.03 C3.1 4148.43,726.97 4100.39,775 R6.2
NetC6_1: C6.1 U3.3 | length 112.3
  Top Layer w10: C6.1 2351.57,7376.97 2375,7400.39 U3.3
NetC6_2: C6.2 U3.1 | length 112.3
  Top Layer w10: U3.1 2275,7400.39 2298.43,7376.97 C6.2
NetC7_2: C7.2 U3.2 | length 170.2
  Top Layer w10: C7.2 2281.1,7548.43 2325,7504.53 U3.2
NetC8_2: C8.2 U3.6 | length 112.3
  Top Layer w10: U3.6 2525,7400.39 2548.43,7376.97 C8.2
NetC9_1: C9.1 U3.5 | length 103.9
  Top Layer w10: U3.5 2475,7378.15 C9.1
NetC9_2: C9.2 U3.4 | length 102.6
  Top Layer w10: C9.2 U3.4
NetD1_1: D1.1 R10.2 | length 123.1
  Top Layer w10: R10.2 D1.1
NetJ7_2: J7.2 U3.14 | length 275.4
  Top Layer w10: J7.2 2370.47,7939.57 2370.47,7676.97 U3.14
NetJ7_3: J7.3 U3.13 | length 292.4
  Top Layer w10: U3.13 2425,7894.09 J7.3
NetR1_1: R1.1 R3.2 U1.8 | length 334.1
  Top Layer w10: R3.2 R1.1 2034.45,835.83 2070.28,800 U1.8 2099.94,797.3 U1.8@2109.45,806.81
NetR5_1: R5.1 R7.2 U2.8 | length 346
  Top Layer w10: R7.2 R5.1 3834.45,835.83 3870.28,800 U2.8 3916.78,800 U2.8@3923.59,806.81
PWM0: J2.11 J8.2 | length 2152.7
  Int2 w10: J2.11 4488,5488 4488,5870 4470,5888 4424.64,5888 4412.64,5900 4412.64,5988 5388,5988 5447,5929 5829,5929 J8.2
PWM1: J2.13 J9.2 | length 1813.3
  Top Layer w10: J2.13 4509,5291 5082,5291 v1(5520.5,5729.5)
  Int2 w10: v1(5520.5,5729.5) J9.2
PWM2: J2.19 J13.2 | length 1630.6
  Top Layer w10: J2.19 4493,5093 v1(5507,5093)
  Int2 w10: v1(5507,5093) J13.2
PWM3: J2.25 J14.2 | length 1739.9
  Top Layer w10: J2.25 v1(5200,4750)
  Int2 w10: v1(5200,4750) J14.2
PWM4: J2.41 J17.2 | length 1677.8
  Int2 w10: J2.41 4600,3950 4856,3694 5606,3694 J17.2
PWM5: J2.43 J18.2 | length 1905.6
  Int2 w10: J2.43 4600,3850 5166,3284 5366,3284 J18.2
PWM6: J2.51 J21.2 | length 2038.5
  Int2 w10: J2.51 4600,3450 5418,2632 5418,2582 J21.2
PWM7: J2.55 J22.2 | length 2488.5
  Int2 w10: J2.55 4600,3250 4758,3092 4758,2592 J22.2
PWM8A: J2.31 J10.1 | length 2986.5
  Bottom Layer w10: J2.31 4496,4496 4496,5727.89 4646,5727.89 J10.1
PWM8B: J2.33 J10.2 | length 3155
  Bottom Layer w10: J2.33 4537,4437 4537,5405 4687,5405 5817,6535 5817,6733.54 J10.2
PWM8C: J2.35 J10.3 | length 3420.7
  Bottom Layer w10: J2.35 4600,4250 4759,4409 4759,4869 5467,5577 5467,6130 5794,6457 5960,6457 5983,6480 5983,6734.18 J10.3
SPI1_CS: J1.66 J26.4 | length 1488.3
  Int2 w10: J26.4 1600,2196.06 1600,2550 1800,2750 J1.66
SPI1_MISO: J1.63 J26.3 | length 2067.1
  Int2 w10: J26.3 1369.29,1600 1900,1600 2150,1850 2150,2750 J1.63
SPI1_MOSI: J1.45 J26.2 | length 2392.8
  Int2 w10: J26.2 1837.36,2102.72 1987.36,2102.72 1987.36,3640.2 2050,3702.84 J1.45
SPI1_SCK: J1.70 J26.1 | length 995
  Top Layer w10: J26.1 1950,2050 J1.70
SPI2_CS: J2.27 J27.4 | length 3343.7
  Top Layer w10: J27.4 1322.65,4538 1865,4538 1891,4512 4390,4512 4400,4522 4400,4600 J2.27
SPI2_MISO: J1.35 J27.3 | length 817.5
  Top Layer w10: J27.3 1760,4292 2008,4292 J1.35
SPI2_MOSI: J1.37 J27.2 | length 841.2
  Top Layer w10: J27.2 1307.35,4192 2008,4192 J1.37
SPI2_SCK: J1.40 J27.1 | length 733.4
  Top Layer w10: J27.1 1330.71,4050 J1.40
SPI3_CS: J1.32 J28.4 | length 2125.8
  Int2 w10: J28.4 1750,5698.03 1900,5698.03 1900,4500 J1.32
SPI3_MISO: J1.02 J28.3 | length 734.2
  Top Layer w10: J28.3 1332.68,5950 J1.02
SPI3_MOSI: J1.43 J28.2 | length 2488.1
  Int2 w10: J28.2 1318,5799.32 1318,4724 1742,4300 1980,4300 2000,4280 2000,3900 J1.43
SPI3_SCK: J1.01 J28.1 | length 902.7
  Top Layer w10: J28.1 1448.03,5900 2000,5900 J1.01
SPI4_CS: J1.48 J32.4 | length 782.9
  Top Layer w10: J32.4 1324.03,3524 1537,3524 1663,3650 J1.48
SPI4_MISO: J1.50 J32.3 | length 748.6
  Top Layer w10: J32.3 1832.68,3432.68 J1.50
SPI4_MOSI: J1.62 J32.2 | length 831.4
  Top Layer w10: J32.2 1482.68,3267.32 1800,2950 J1.62
SPI4_SCK: J1.46 J32.1 | length 1025.8
  Bottom Layer w10: J32.1 1496,3347.97 1496,3446 1800,3750 J1.46
SPI5_CS: J1.09 J33.4 | length 883.7
  Top Layer w10: J33.4 1401.97,5500 2000,5500 J1.09
SPI5_MISO: J1.54 J33.3 | length 2311.1
  Bottom Layer w10: J33.3 1620,4812.68 1620,4280 1699,4201 1967,4201 1988,4180 1988,3388 J1.54
SPI5_MOSI: J1.56 J33.2 | length 2145.1
  Int2 w10: J33.2 1303,4964.32 1303,4705 1533,4475 1533,3517 1800,3250 J1.56
SPI5_SCK: J1.11 J33.1 | length 1518.4
  Top Layer w10: J33.1 1121,4980.97 1121,5120 1135,5134 1192,5134 1197,5129 1854,5129 1913,5188 2005,5188 2010,5193 2010,5410 J1.11
SPI6_CS: J2.66 J34.4 | length 3246.6
  Top Layer w10: J34.4 1414.97,2863 1574,2863 1725,2712 4312,2712 J2.66
SPI6_MISO: J1.65 J34.3 | length 890
  Bottom Layer w10: J34.3 1510.68,2532.68 1666,2688 1988,2688 J1.65
SPI6_MOSI: J2.61 J34.2 | length 3649.2
  Top Layer w10: J34.2 1499.32,2367.32 1744,2612 4387,2612 4412,2637 4412,2680 4444,2712 4470,2712 4488,2730 4488,2912 J2.61
SPI6_SCK: J1.68 J34.1 | length 885.6
  Bottom Layer w10: J34.1 1351.97,2201.97 1800,2650 J1.68
UART5_RX: J1.04 U3.12 | length 2251.1
  Top Layer w10: J1.04 2000,5800 2146,5800 2506,6160 2506,7399 2500,7405 2500,7558 2475,7583 U3.12
UART5_TX: J1.03 U3.11 | length 2181.9
  Top Layer w10: J1.03 2400,6200 2400,7348.46 2397.28,7351.17 2397.28,7398.83 2400,7401.54 2400,7561 2450,7611 2450,7717 2481,7748 2497,7748 2525,7720 U3.11
UART7_RX: J2.44 J24.2 | length 4433
  Int2 w10: J24.2 3598,7898 3598,4602 J2.44
UART7_TX: J2.40 J24.1 | length 4024.6
  Int2 w10: J24.1 3759,7675.65 3759,4641 J2.40
UART8_RX: J2.64 J25.2 | length 5146.7
  Int2 w10: J2.64 4402,2902 4402,5848.58 4397.64,5852.94 4397.64,5998 4402,6002.36 4402,7898 J25.2
UART8_TX: J1.61 J25.1 | length 5787.3
  Bottom Layer w10: J1.61 2233,3133 2233,3442 4280,5489 4280,7714.65 J25.1
VCC_PWM: J8.1 J9.1 J10.4 J13.1 J14.1 J17.1 J18.1 J21.1 J22.1 R9.2
VIN: J1.24 J31.2 R10.1 | length 3653.1
  Top Layer w10: R10.1 1192.84,7744.41 J31.2
  Bottom Layer w30: J31.2 1250,6650 1600,6300 1600,5050 1800,4850 J1.24
pads on no net: J1.05 J1.06 J1.07 J1.10 J1.12 J1.13 J1.14 J1.15 J1.17 J1.21 J1.23 J1.25 J1.26 J1.27 J1.28 J1.29 J1.30 J1.31 J1.33 J1.34 J1.36 J1.39 J1.41 J1.42 J1.44 J1.47 J1.52 J1.58 J1.59 J1.64 J1.67 J1.69 J2.02 J2.04 J2.06 J2.07 J2.08 J2.10 J2.12 J2.14 J2.15 J2.16 J2.18 J2.21 J2.22 J2.26 J2.28 J2.30 J2.32 J2.34 J2.45 J2.46 J2.47 J2.48 J2.49 J2.52 J2.53 J2.56 J2.62 J2.65 J2.67 J2.68 J2.69 J2.70 J3.1 J3.3 J3.4 J3.5 J3.6 J3.8 J3.9 J4.1 J4.3 J4.4 J4.5 J4.6 J4.8 J4.9 J5. J6. J7.1 J7.4 J7.6 J7.7 J7.8 J7.9 J8. J9. J10.5 J11. J12. J13. J14. J15. J16. J17. J18. J19. J20. J21. J22. J23. J24. J25. J26. J27. J28. J29. J30. J32. J33. J34. J35. J36. U3.7 U3.8 U3.9 U3.10

## Polygon pours and split planes (outlines as drawn)
VCC_PWM on Top Layer "VCC_PWM_L01_P002" (solid, pour order 2): 5650,1375 5825,1375 5825,6925 5650,6925 5650,6650 5175,6650 5175,6550 5650,6550
3V3 on Top Layer "3V3_L01_P001" (solid, pour order 1): 500,6950 625,6950 625,5300 2000,5300 2000,5200 625,5200 625,1150 500,1150
GND on Int1 "GND_L02_P010" (solid, pour order 10): 50,8350 50,50 6250,50 6250,8350

## Other copper
Top Layer:
  region: 2372,1906 2404,1906 2404,1722 2412,1722 2380,1722 2380,1738 2428,1738 2428,1730 2428,1722 2428,1714 2428,1706 2372,1706 2372,1714 2372,1722 2372,1730 2372,1738 2372,1746 2372,1754 2372,1762 2372,1770 2372,1778 2372,1786 2372,1794 2372,1802 2372,1810 2372,1818 2372,1826 2372,1834 2372,1842 2372,1850 2372,1858 2372,1866 2372,1874 2372,1882 2356,1882 2356,1890 2364,1890 2364,1898 2364,1906
  region: 2412,1962 2412,1954 2412,1946 2412,1938 2412,1930 2412,1922 2412,1914 2412,1906 2412,1898 2412,1890 2412,1882 2396,1882 2396,1938 2396,1930 2396,1914 2396,1906 2372,1906 2372,1914 2372,1922 2380,1922 2380,1930 2388,1930 2388,1938 2388,1946 2396,1946 2396,1954 2404,1954 2404,1962 2404,1970 2412,1970
  region: 2460,2098 2460,2082 2452,2082 2444,2082 2444,2090 2444,2098 2452,2098 2452,2106 2460,2106
  region: 2468,2114 2468,2106 2460,2106 2460,2114 2460,2122 2468,2122
  region: 2476,2130 2476,2122 2484,2122 2484,2114 2484,2106 2492,2106 2492,2098 2500,2098 2500,2090 2500,2082 2484,2082 2484,2090 2484,2098 2484,2106 2476,2106 2476,2114 2476,2122 2468,2122 2468,2130 2468,2138 2476,2138
  region: 2484,1810 2484,1802 2484,1794 2484,1786 2484,1778 2484,1770 2484,1762 2484,1754 2484,1746 2484,1738 2484,1730 2484,1722 2484,1714 2484,1706 2484,1698 2484,1690 2484,1682 2484,1674 2484,1666 2484,1658 2484,1650 2484,1642 2492,1642 2492,1634 2500,1634 2500,1626 2508,1626 2508,1618 2508,1610 2508,1602 2508,1594 2500,1594 2500,1586 2492,1586 2492,1578 2460,1578 2460,1586 2460,1594 2460,1602 2460,1610 2460,1618 2460,1626 2460,1634 2460,1642 2460,1650 2460,1658 2460,1666 2460,1674 2460,1682 2460,1690 2460,1698 2460,1706 2460,1714 2460,1722 2460,1730 2460,1738 2460,1746 2460,1754 2460,1762 2460,1770 2460,1778 2460,1786 2460,1794 2460,1802 2460,1810 2460,1818 2460,1826 2460,1834 2460,1842 2460,1850 2460,1858 2460,1866 2460,1874 2460,1882 2460,1890 2460,1898 2460,1906 2460,1914 2460,1922 2460,1930 2460,1938 2460,1946 2460,1954 2460,1962 2460,1970 2460,1978 2460,1986 2460,1994 2460,2002 2460,2010 2460,2018 2460,2026 2460,2034 2460,2042 2460,2050 2460,2058 2460,2066 2460,2122 2484,2122
  region: 2484,2074 2484,2066 2484,2058 2484,2050 2484,2042 2484,2034 2484,2026 2484,2018 2484,2010 2484,2002 2484,1994 2484,1986 2484,1978 2484,1970 2484,1962 2484,1954 2484,1946 2484,1938 2484,1930 2484,1922 2484,1914 2484,1906 2484,1898 2484,1890 2484,1882 2484,1874 2484,1866 2484,1858 2484,1850 2484,1842 2484,1834 2548,1834 2548,1818 2484,1818 2484,1834 2476,1834 2476,1842 2476,1850 2476,1858 2476,1866 2476,1874 2476,1882 2476,1890 2476,1898 2476,1906 2476,1914 2476,1922 2476,1930 2476,1938 2476,1946 2476,1954 2476,1962 2476,1970 2476,1978 2476,1986 2476,1994 2476,2002 2476,2010 2476,2018 2476,2026 2476,2034 2476,2042 2476,2050 2476,2058 2476,2066 2476,2074 2476,2082 2484,2082
  region: 2572,1954 2572,1946 2572,1938 2572,1930 2572,1922 2572,1914 2572,1906 2572,1898 2572,1890 2572,1882 2572,1874 2572,1866 2572,1858 2572,1850 2572,1842 2572,1834 2572,1826 2572,1818 2572,1810 2484,1810 2484,1818 2564,1818 2564,1826 2564,1834 2564,1842 2564,1850 2564,1858 2564,1866 2564,1874 2564,1882 2564,1890 2564,1898 2564,1906 2564,1914 2564,1922 2564,1930 2564,1938 2564,1946 2564,1954 2564,1970 2572,1970
  region: 2596,2026 2596,2018 2596,2010 2596,2002 2596,1994 2596,1986 2596,1978 2596,1970 2596,1962 2572,1962 2572,1970 2588,1970 2532,1970 2548,1970 2564,1970 2564,1818 2548,1818 2548,1842 2548,1850 2548,1858 2548,1866 2548,1874 2548,1882 2548,1890 2548,1898 2548,1906 2548,1914 2548,1922 2548,1930 2548,1938 2548,1946 2548,1954 2548,1962 2524,1962 2524,1970 2524,1978 2524,1986 2524,1994 2524,2002 2524,2010 2524,2018 2524,2026 2524,2034 2596,2034
  text "Real Time Controller v1.0 / for UCSD evGoKart /  / ECE 191 Fall 2021 / Ryan Tran, Roger Kim" at 2800,1610 h50

## Silkscreen, mask and mechanical layers (free items; w line width, h text height)
Top Overlay:
  lines w5: 50,850 800,850 800,7180 50,7180 ; 6250,1150 5550,1150 5550,7100 6250,7100 ; 900,1300 1850,1300 1850,2200 1850,2350 1600,2350 1600,6450 900,6450 900,6400 900,1300 ; 4800,2500 5450,2500 5450,6150 4850,6150 4800,6150 4800,2500
  lines w10: 1550,50 1550,1175 4750,1175 4750,50 ; 1750,8350 1750,7150 4650,7150 4650,8300 4650,8350 ; 1850,2450 4550,2450 4550,6200 1850,6200 1850,2450
  text "Power" at 1410,7940 h60 r270
  text "Analog" at 829.99,7190 h60 r270
  text "UART" at 3340,7090 h60 r180
  text "SPI" at 1160,6510 h60
  text "5V Jumper" at 5010,6473.33 h40
  text "NUCLEO" at 3010,6260 h60
  text "I2C" at 5060,6210 h60
  text "CAN 1" at 2110,1210 h60
  text "CAN 2" at 3910,1210 h60
  text "DIGITAL" at 5490,1160 h60 r90
Top Solder:
  drawing of 9 lines, arcs and shapes, not listed
  text "Real Time Controller v1.0 / for UCSD evGoKart /  / ECE 191 Fall 2021 / Ryan Tran, Roger Kim" at 2800,1610 h50
Mechanical 1:
  the board outline again, w47.24